# Altium PCB LM-004-B.PcbDoc
Units mm, origin at the board's own origin, x right, y up, seen from the top; angles counter-clockwise.
Board outline 54.74 x 91.16 mm, 2 copper layers (Top Layer, Bottom Layer), stack 0.325 mm thick; 42 components, 65 nets, 272 pads, 39 vias.
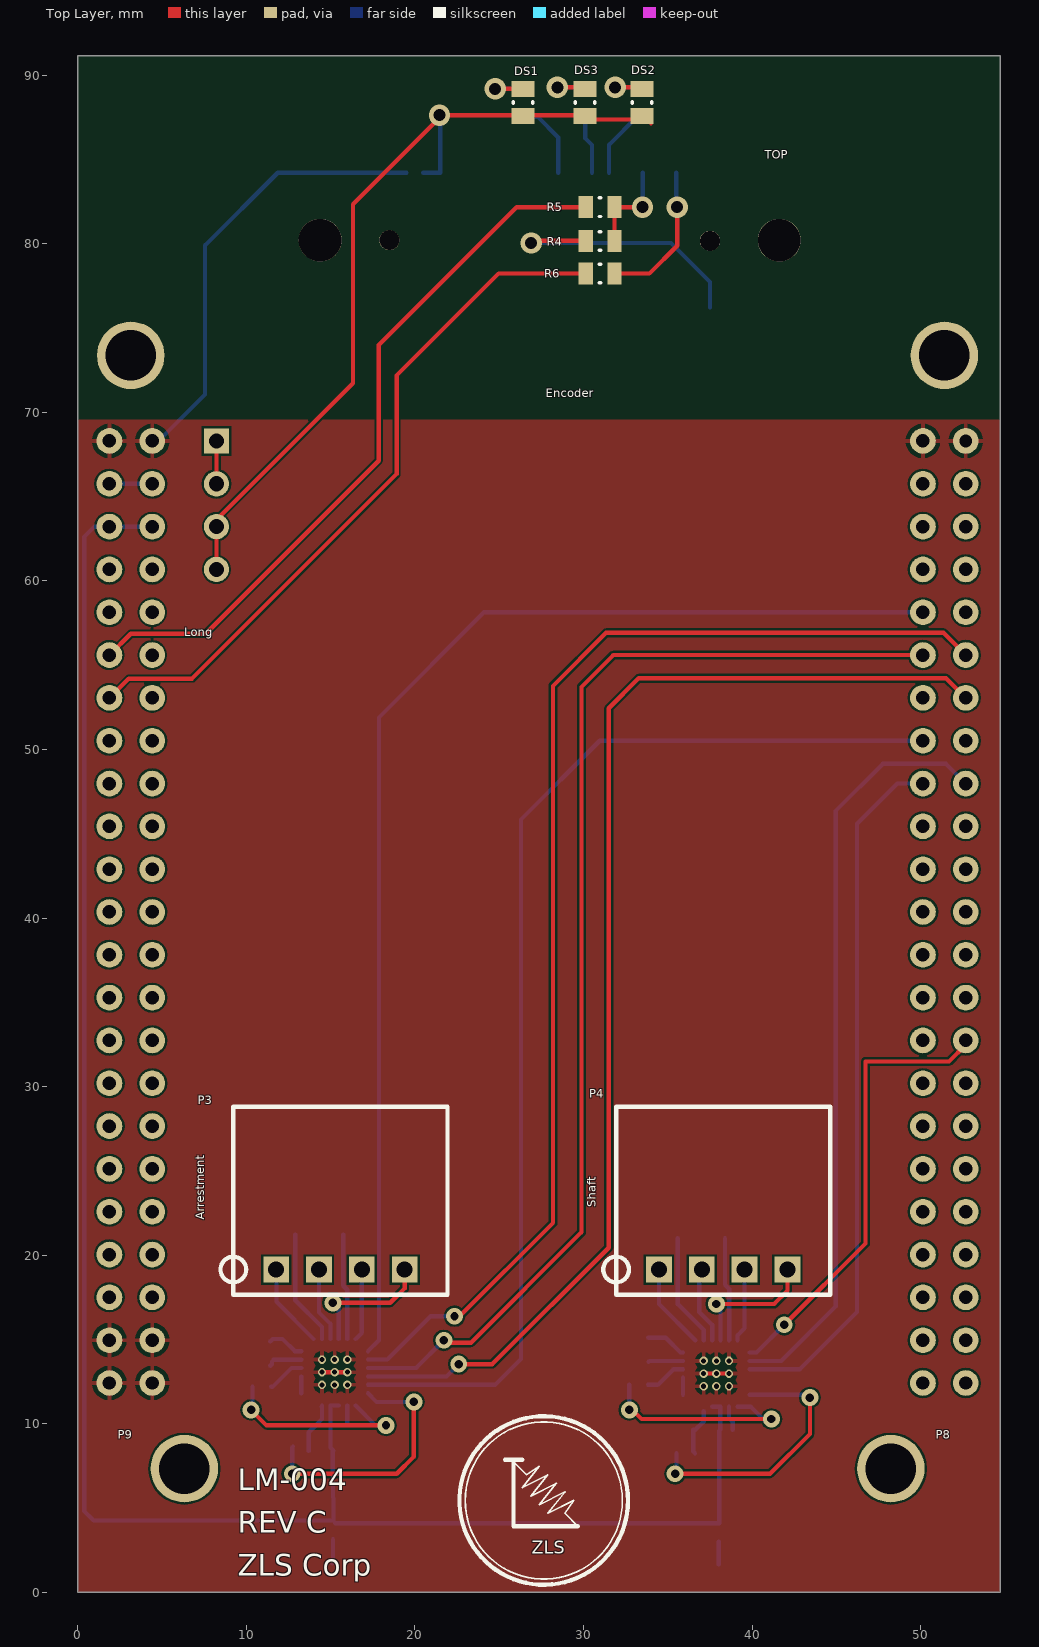
[diagram p0: Top Layer view]
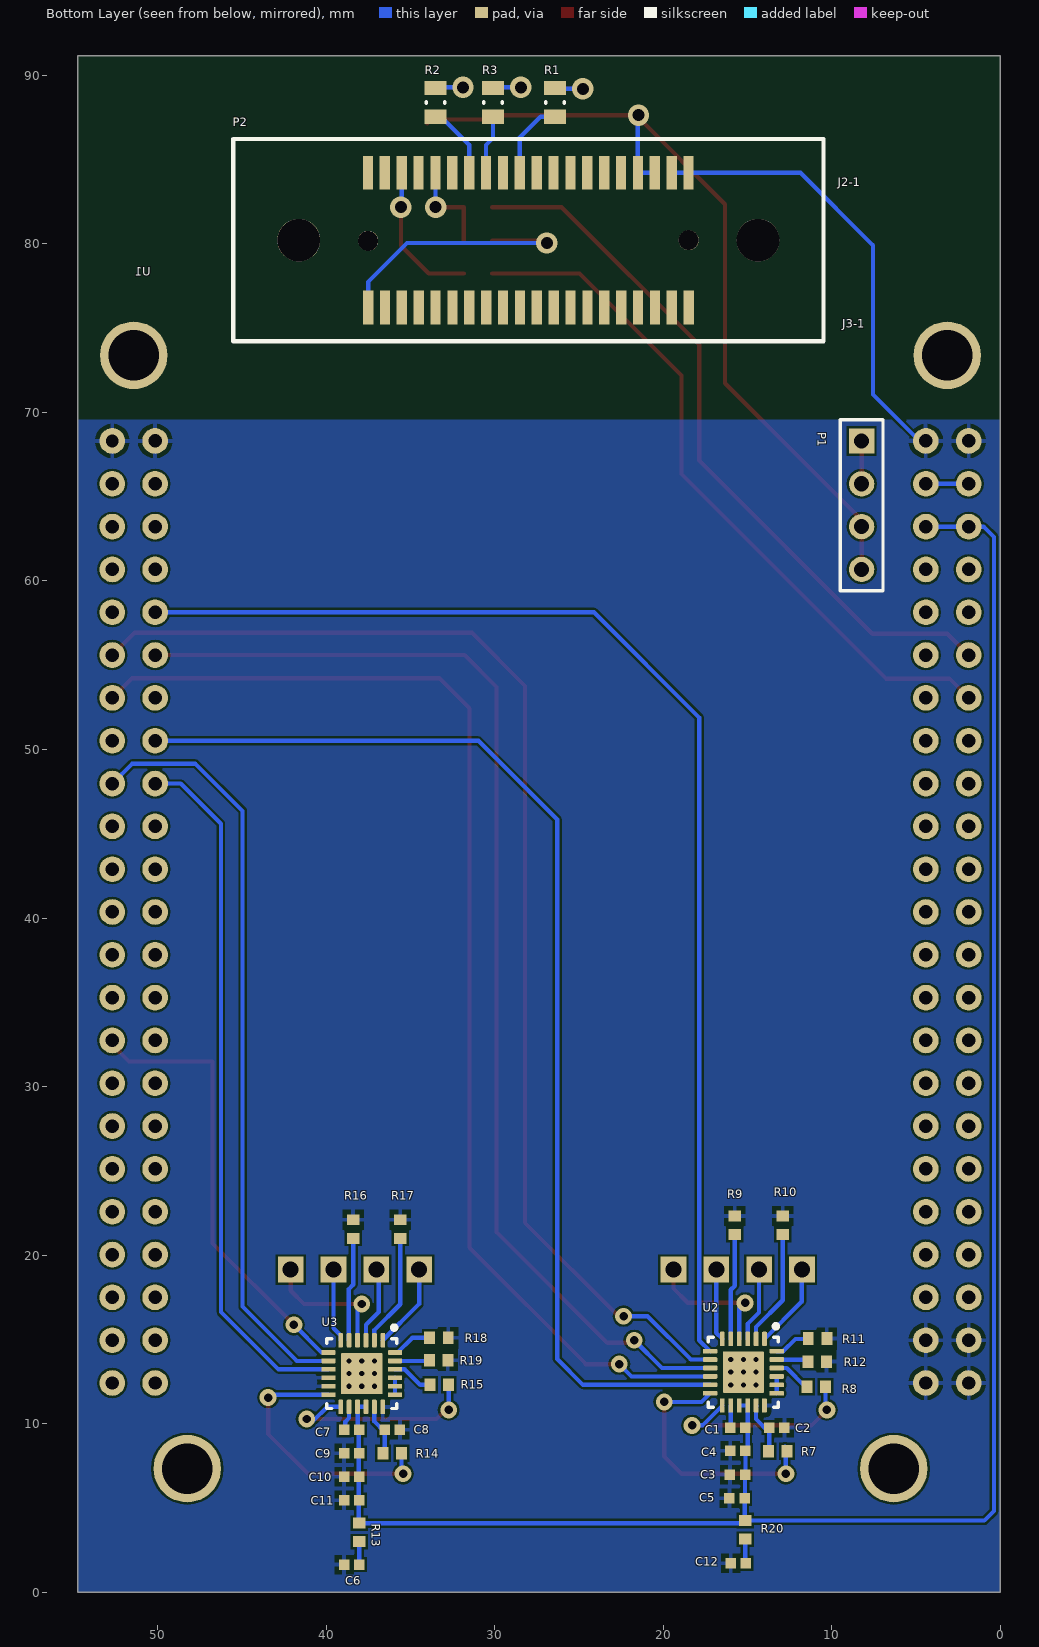
[diagram p1: Bottom Layer view, seen from below]

## Layer stack, top to bottom
Top Solder: solder mask 0.0102, Solder Resist, Dk 3.5
Top Layer: signal copper 0.0356
Dielectric 1: core 0.254, FR-4, Dk 4.2
Bottom Layer: signal copper 0.0356
Bottom Solder: solder mask 0.0102, Solder Resist, Dk 3.5

## Board outline
-0.006,0 54.737,0 54.737,91.161 -0.006,91.161

## Design rules (kind name [scope] priority, off if disabled: settings)
Clearance [All] p1: gap=0.127 ignorepadtopadclearanceinfootprint=FALSE
HoleSize [All] p1: absolutevalues=TRUE maxlimit=5 minlimit=0.025 maxpercent=80.000 minpercent=20.000
MinimumSolderMaskSliver [All] p1: minsoldermaskwidth=0.04
PolygonConnect [All] p1: connectstyle=Relief reliefconductorwidth=0.254 reliefentries=4 polygonreliefangle="90 Angle" airgapwidth=0.254
RoutingVias [All] p1: holewidth=0.711 width=1.27 viastyle="Through Hole" minholewidth=0.711 minwidth=1.27 maxholewidth=0.711 maxwidth=1.27
SilkToSolderMaskClearance [IsPad] p1: minsilkscreentomaskgap=0.1 clearancetoexposedcopper=TRUE
SolderMaskExpansion [All] p1: expansion=0.102
Width [All] p1: maxlimit=0.254 minlimit=0.254 preferedwidth=0.254
27 further rules are at their usual default settings.

## Classes and differential pairs
component class BBB_Connections: P1 U1
component class Bluetooth: DS1 DS2 DS3 P2 R1 R2 R3 R4 R5 R6
component class "Stepper Motor Driver": C1 C2 C3 C4 C5 C6 C7 C8 C9 C10 C11 C12 P3 P4 R7 R8 R9 R10 R11 R12 R13 R14 R15 R16 R17 R18 R19 R20 R29 U2 U3

## Components (designator, comment, footprint, x,y, rotation, side; value= is the part's Value field where it differs from the comment)
C1 ".01uF" CAPC0402(1005)60_N 15.57,9.779 r0 bottom
C2 "2.2uF" CAPC0402(1005)60_N 13.259,9.779 r0 bottom
C3 "10uF" CAPC0402(1005)60_N 15.596,6.985 r180 bottom
C4 ".01uF" CAPC0402(1005)60_N 15.57,8.407 r180 bottom
C5 ".01uF" CAPC0402(1005)60_N 15.621,5.588 r180 bottom
C6 "10uF" CAPC0402(1005)60_N 38.481,1.651 r180 bottom
C7 ".01uF" CAPC0402(1005)60_N 38.481,9.652 r0 bottom
C8 "2.2uF" CAPC0402(1005)60_N 36.068,9.652 r0 bottom
C9 "10uF" CAPC0402(1005)60_N 38.481,8.255 r180 bottom
C10 ".01uF" CAPC0402(1005)60_N 38.481,6.858 r180 bottom
C11 ".01uF" CAPC0402(1005)60_N 38.481,5.461 r180 bottom
C12 "10uF" CAPC0402(1005)60_N 15.545,1.727 r180 bottom
DS1 "Lite-On LTST-S220KGKT Green LED, 571 nm 2012 (0805) Side View, Rectangle Lens SMD package" 0805C_L 26.416,88.392 r90 top
DS2 "Lite-On LTST-S220KGKT Green LED, 571 nm 2012 (0805) Side View, Rectangle Lens SMD package" 0805C_L 33.477,88.392 r90 top
DS3 "Lite-On LTST-S220KGKT Green LED, 571 nm 2012 (0805) Side View, Rectangle Lens SMD package" 0805C_L 30.099,88.392 r90 top
P1 "SSW-104-01-G-S" HDR1X4 8.23,68.301 r270 bottom
P2 "FSI-120-03-G-D-E-AB" FSI-120-03-G-D-E-AB 27.997,80.213 r180 bottom
P3 "IPL1-104-01-L-S-RA-K" IPL1-104-01-L-S-RA-K 11.771,19.152 r0 top
P4 "IPL1-104-01-L-S-RA-K" IPL1-104-01-L-S-RA-K 34.479,19.152 r0 top
R1 "3.9k" RESC0805(2012)_L 26.416,88.392 r90 bottom
R2 "3.9k" RESC0805(2012)_L 33.503,88.392 r90 bottom
R3 "3.9k" RESC0805(2012)_L 30.099,88.392 r90 bottom
R4 "10K" RESC0805(2012)_L 30.988,80.173 r0 top value=3.9k
R5 "100" RESC0805(2012)_L 30.988,82.169 r0 top value=3.9k
R6 "100" RESC0805(2012)_L 30.988,78.232 r0 top value=3.9k
R7 "47K" RESC0402(1005)_M 13.208,8.382 r180 bottom
R8 "10k" RESC0402(1005)_M 10.922,12.192 r180 bottom
R9 "0.1R" RESC0402(1005)_M 15.75,21.773 r90 bottom
R10 "0.1R" RESC0402(1005)_M 12.905,21.773 r90 bottom
R11 "47K" RESC0402(1005)_M 10.846,15.062 r180 bottom
R12 "47K" RESC0402(1005)_M 10.871,13.691 r180 bottom
R13 "1" RESC0402(1005)_M 38.031,3.556 r270 bottom
R14 "47K" RESC0402(1005)_M 36.068,8.255 r180 bottom
R15 "10K" RESC0402(1005)_M 33.274,12.311 r180 bottom
R16 "0.1R" RESC0402(1005)_M 38.393,21.555 r90 bottom
R17 "0.1R" RESC0402(1005)_M 35.599,21.555 r90 bottom
R18 "47K" RESC0402(1005)_M 33.301,15.102 r180 bottom
R19 "47K" RESC0402(1005)_M 33.325,13.767 r180 bottom
R20 "1" RESC0402(1005)_M 15.14,3.708 r270 bottom
U1 "BBB" "BEAGLEBONE BLACK MEZANINE" 27.28,40.361 r180 bottom locked
U2 "DRV8834RGER" RGE0024B_V 15.242,13.061 r270 bottom
U3 "DRV8834RGER" RGE0024B_V 37.882,12.979 r270 bottom

## Footprints (in the part's own frame and the unit in brackets; to place one, negate y for a bottom-side part, rotate by r counter-clockwise, add the part's x,y. Pads: shape width x height; smd on the part's side, far side on the other; paste and mask are expansions set on the pad)
0805C_L [mm]
  rect 0.95x1.35 smd: 1(-0.8,0) 2(0.8,0)
  silkscreen extent -0.05,-0.58 0.05,0.58, body extent -1.1,-0.72 1.1,0.72, height 0.75
"BEAGLEBONE BLACK MEZANINE" [mil]
  round 60 hole 31.5: 8-1(-900,1100) 8-3(-900,1000) 8-4(-1000,1000) 8-5(-900,900) 8-6(-1000,900) 8-7(-900,800) 8-8(-1000,800) 8-9(-900,700) 8-10(-1000,700) 8-11(-900,600) 8-12(-1000,600) 8-13(-900,500) 8-14(-1000,500) 8-15(-900,400) 8-16(-1000,400) 8-17(-900,300) 8-18(-1000,300) 8-19(-900,200) 8-20(-1000,200) 8-21(-900,100) 8-22(-1000,100) 8-23(-900,0) 8-24(-1000,0) 8-25(-900,-100) 8-26(-1000,-100) 8-27(-900,-200) 8-28(-1000,-200) 8-29(-900,-300) 8-30(-1000,-300) 8-31(-900,-400) 8-32(-1000,-400) 8-33(-900,-500) 8-34(-1000,-500) 8-35(-900,-600) 8-36(-1000,-600) 8-37(-900,-700) 8-38(-1000,-700) 8-39(-900,-800) 8-40(-1000,-800) 8-41(-900,-900) 8-42(-1000,-900) 8-43(-900,-1000) 8-44(-1000,-1000) 8-45(-900,-1100) 8-46(-1000,-1100) 9-1(1000,1100) 9-2(900,1100) 9-3(1000,1000) 9-4(900,1000) 9-5(1000,900) 9-6(900,900) 9-7(1000,800) 9-8(900,800) 9-9(1000,700) 9-10(900,700) 9-11(1000,600) 9-12(900,600) 9-13(1000,500) 9-14(900,500) 9-15(1000,400) 9-16(900,400) 9-17(1000,300) 9-18(900,300) 9-19(1000,200) 9-20(900,200) 9-21(1000,100) 9-22(900,100) 9-23(1000,0) 9-24(900,0) 9-25(1000,-100) 9-26(900,-100) 9-27(1000,-200) 9-28(900,-200) 9-29(1000,-300) 9-30(900,-300) 9-31(1000,-400) 9-32(900,-400) 9-33(1000,-500) 9-34(900,-500) 9-35(1000,-600) 9-36(900,-600) 9-37(1000,-700) 9-38(900,-700) 9-39(1000,-800) 9-40(900,-800) 9-41(1000,-900) 9-42(900,-900) 9-43(1000,-1000) 9-44(900,-1000) 9-45(1000,-1100) 9-46(900,-1100)
  round 60 hole 30 paste+0: 8-2(-1000,1100)
  round 157.48 hole 118.11 paste+0: ""(-950,1300)
  round 157.48 hole 118.11: ""(-825,-1300) ""(825,-1300) ""(950,1300)
  body extent -1047,-1163 1048,1157, height 335
CAPC0402(1005)60_N [mm] "Chip Capacitor, Body 1.0x0.5mm, Height 0.6mm, IPC Medium Density"
  rect 0.62x0.62 smd: 1(-0.45,0) 2(0.45,0)
  body extent -0.55,-0.3 0.55,0.3, height 0.6
FSI-120-03-G-D-E-AB [mil]
  round 100 hole 100: hole(-536.2,0) hole(536.2,0)
  round 47 hole 47: hole(-374.3,-1.6) hole(374.3,0)
  rect 24x78.74 smd: J2-1(373.91,157.36) J2-2(334.51,157.36) J2-3(295.11,157.36) J2-4(255.71,157.36) J2-5(216.31,157.36) J2-6(176.91,157.36) J2-7(137.51,157.36) J2-8(98.11,157.36) J2-9(58.71,157.36) J2-10(19.31,157.36) J2-11(-20.09,157.36) J2-12(-59.49,157.36) J2-13(-98.89,157.36) J2-14(-138.29,157.36) J2-15(-177.69,157.36) J2-16(-217.09,157.36) J2-17(-256.49,157.36) J2-18(-295.89,157.36) J2-19(-335.29,157.36) J2-20(-374.69,157.36) J3-1(374.3,-157.36) J3-2(334.9,-157.36) J3-3(295.5,-157.36) J3-4(256.1,-157.36) J3-5(216.7,-157.36) J3-6(177.3,-157.36) J3-7(137.9,-157.36) J3-8(98.5,-157.36) J3-9(59.1,-157.36) J3-10(19.7,-157.36) J3-11(-19.7,-157.36) J3-12(-59.1,-157.36) J3-13(-98.5,-157.36) J3-14(-137.9,-157.36) J3-15(-177.3,-157.36) J3-16(-216.7,-157.36) J3-17(-256.1,-157.36) J3-18(-295.5,-157.36) J3-19(-334.9,-157.36) J3-20(-374.3,-157.36)
  silkscreen extent -689,-236 689,236, body extent -633,-179 710,188, height 162
HDR1X4 [mm] "Connector; Header; 4 Position"
  rect 1.5x1.5 hole 0.9: 1(0,0)
  round 1.5 hole 0.9: 2(2.54,0) 3(5.08,0) 4(7.62,0)
  silkscreen extent -1.27,-1.27 8.89,1.27
IPL1-104-01-L-S-RA-K [mil]
  rect 60x60 hole 37.4: 1(0,0) 2(100,0) 3(200,0) 4(300,0)
  silkscreen extent -130,-59 400,380, body extent -80,-12 380,380, height 258
RESC0402(1005)_M [mm] "Chip Resistor, Body 1.0x0.5mm, IPC Low Density"
  rect 0.65x0.75 smd: 1(-0.55,0) 2(0.55,0)
  body extent -0.52,-0.28 0.53,0.28, height 0.4
RESC0805(2012)_L [mm] "Chip Resistor, Body 2.0x1.3mm, IPC High Density"
  rect 0.85x1.3 smd: 1(-0.85,0) 2(0.85,0)
  silkscreen extent -0.05,-0.55 0.05,0.55, body extent -1.1,-0.67 1.1,0.68, height 0.7
RGE0024B_V [mm] "QFN, 24-Leads, Body 4x4mm, Pitch 0.5mm, Thermal Pad 2.45x2.45mm"
  rrect36% 0.85x0.28 smd paste-0.025 mask+0.07: 1(-1.975,1.25) 2(-1.975,0.75) 3(-1.975,0.25) 4(-1.975,-0.25) 5(-1.975,-0.75) 6(-1.975,-1.25) 13(1.975,-1.25) 14(1.975,-0.75) 15(1.975,-0.25) 16(1.975,0.25) 17(1.975,0.75) 18(1.975,1.25)
  rrect36% 0.28x0.85 smd paste-0.025 mask+0.07: 7(-1.25,-1.975) 8(-0.75,-1.975) 9(-0.25,-1.975) 10(0.25,-1.975) 11(0.75,-1.975) 12(1.25,-1.975) 19(1.25,1.975) 20(0.75,1.975) 21(0.25,1.975) 22(-0.25,1.975) 23(-0.75,1.975) 24(-1.25,1.975)
  rrect4% 2.45x2.45 smd paste-3 mask+0.07: 25(0,0)
  silkscreen extent -2.85,-2.07 2.07,2.07, body extent -2,-2 2,2, height 1

## Part data
C1 C2 C3 C4 C5 C6 C7 C8 C9 C10 C11 C12: library part CMP-1034-01365-1, "CAP 220pF 25V ±10% 0402 (1005 Metric) Thickness 0.6mm SMD"
DS1 DS2 DS3: library part "LED A/K", Case/Package=0805, Case Code (Metric)=2012, Colour=Green, Forward Current=20mA, Forward Voltage=2V, Lens Colour=Colorless, Manufacturer="Vishay / Lite-On", Manufacturer Part Number=LTST-S220KGKT, Max Operating Temperature=85°C, Min Operating Temperature=-55°C, Package Quantity=4000, Power Dissipation=75W, Power Rating=75mW, Supplier Part Number 1=160-1468-1-ND, Case Code (Imperial)=0805, ComponentLink1Description=https://datasheet.ciiva.com/11775/0900766b80dc0b70-11775441.pdf, ComponentLink1URL=https://datasheet.ciiva.com/11775/0900766b80dc0b70-11775441.pdf, ComponentLink2Description=https://datasheet.ciiva.com/2110/s-110-ltst-s220kgkt-2110069.pdf, ComponentLink2URL=https://datasheet.ciiva.com/2110/s-110-ltst-s220kgkt-2110069.pdf, ComponentLink3Description=https://datasheet.ciiva.com/2110/s-110-ltst-s220kgkt-2110070.pdf, ComponentLink3URL=https://datasheet.ciiva.com/2110/s-110-ltst-s220kgkt-2110070.pdf, ComponentLink4Description=https://datasheet.ciiva.com/12400/100-ltst-s220kgkt-59602-12400886.pdf, ComponentLink4URL=https://datasheet.ciiva.com/12400/100-ltst-s220kgkt-59602-12400886.pdf, ComponentLink5Description=https://datasheet.ciiva.com/2110/s-110-ltst-s220kgkt-2110071.pdf, ComponentLink5URL=https://datasheet.ciiva.com/2110/s-110-ltst-s220kgkt-2110071.pdf, ComponentLink6Description=https://datasheet.ciiva.com/16379/ltst-s220kgkt-16379082.pdf, ComponentLink6URL=https://datasheet.ciiva.com/16379/ltst-s220kgkt-16379082.pdf, ComponentLink7Description=http://www.farnell.com/cad/2124774.pdf, ComponentLink7URL=http://www.farnell.com/cad/2124774.pdf, ComponentLink8Description=http://www.farnell.com/datasheets/693084.pdf, ComponentLink8URL=http://www.farnell.com/datasheets/693084.pdf, Depth=0.6mm, Dominant Wavelength=568nm, Height=0.6mm, Illumination Colour=Green, Lead Free="Lead Free", Length=2.1mm, Lens Style=Diffused,Colorless, Lens Transparency=Clear, Luminous Intensity=35mcd, Mount="Surface Mount", Number of Elements=1, Number of LEDs=1, Number of Pins=2, Packaging="Tape and Reel", Pricing 1="1=0.29, 10=0.212, 25=0.1564, 100=0.1117, 250=0.0759, 500=0.067, 1000=0.0525 (USD)", Pricing 2="1=0.325, 10=0.317, 100=0.23, 200=0.228, 400=0.182, 900=0.147, 3000=0.114, 9000=0.107 (GBP)", Radiation Hardening=No, RoHS=YES, Stock 1=74800, Stock 2=2271, Supplier 1=Digi-Key, Supplier 2=Farnell, Supplier Part Number 2=2062310, Test Current=20mA, Viewing Angle=130°, Wavelength=574nm, Width=1mm
P1: library part "Header 4", "Header, 4-Pin", Current Rating="5.7A per Contact", Insulation Color=Black, Manufacturer="Samtec Inc.", Material Flammability Rating="UL94 V-0", Operating Temperature="-55°C ~ 125°C", Supplier Part Number 1=SAM1209-04-ND, Voltage Rating=-, Applications=-, Category="Connectors, Interconnects", ComponentLink1Description=http://suddendocs.samtec.com/prints/ssw-1xx-xx-xxx-x-xx-xxx-xx-mkt.pdf, ComponentLink1URL=http://suddendocs.samtec.com/prints/ssw-1xx-xx-xxx-x-xx-xxx-xx-mkt.pdf, Connector Type=Receptacle, Contact Finish - Mating=Gold, Contact Finish - Post=Gold, Contact Finish Thickness - Mating="20.0µin (0.51µm)", Contact Finish Thickness - Post="3.00µin (0.076µm)", Contact Length - Post="0.104\" (2.64mm)", Contact Material="Phosphor Bronze", Contact Shape=Square, Contact Type=Forked, Fastening Type=Push-Pull, Features=-, Ingress Protection=-, Insulation Height="0.335\" (8.51mm)", Insulation Material="Liquid Crystal Polymer (LCP)", Manufacturer Part Number=SSW-104-01-G-S, Mated Stacking Heights=-, Mounting Type="Through Hole", Number of Positions=4, Number of Positions Loaded=All, Packaging=Bulk, Part Status=Active, Pitch - Mating="0.100\" (2.54mm)", Pricing 1="1=1.85, 10=1.654, 100=1.3623, 500=1.07684, 1000=0.9244, 5000=0.84331, 10000=0.81088 (USD)", RoHS="RoHS Compliant", Row Spacing - Mating=-, Stock 1=360, Style="Board to Board or Cable", Supplier 1=Digi-Key, Termination=Solder
P3 P4: Supplier Part Number 1=SAM9597-ND, Supplier 1=Digi-Key
R1 R2 R3 R4 R5 R6: library part CMP-1013-00215-1, "2R55 0.125W 1% 0805 (2012 Metric)  SMD", Case-EIA=0805, Case-Metric=2012, Power="0.125 W", Tolerance="1 %", Technology=SMT
R7 R8 R9 R10 R11 R12 R13 R14 R15 R16 R17 R18 R19 R20: library part CMP-1011-00463-1
U1: library part Beaglebone_Black_Mezanine, "Beaglebone Black", Current Rating="5.7A per Contact", Insulation Color=Black, Manufacturer="Samtec Inc.", Manufacturer Part Number=SSW-123-01-G-D-LL, Material Flammability Rating="UL94 V-0", Operating Temperature="-55°C ~ 125°C", Supplier Part Number 1=SSW-123-01-G-D-LL-ND, Voltage Rating=-, Applications=-, Category="Connectors, Interconnects", Connector Type=Receptacle, Contact Finish - Mating=Gold, Contact Finish - Post=Gold, Contact Finish Thickness - Mating="20.0µin (0.51µm)", Contact Finish Thickness - Post="3.00µin (0.076µm)", Contact Length - Post="0.104\" (2.64mm)", Contact Material="Phosphor Bronze", Contact Shape=Square, Contact Type=Forked, Fastening Type=Push-Pull, Features=-, Ingress Protection=-, Insulation Height="0.335\" (8.51mm)", Insulation Material="Liquid Crystal Polymer (LCP)", Mated Stacking Heights=-, Mounting Type="Through Hole", Number of Positions=46, Number of Positions Loaded=All, Packaging=Bulk, Part Status=Active, Pitch - Mating="0.100\" (2.54mm)", Pricing 1="1=6.07 (USD)", RoHS="RoHS Compliant", Row Spacing - Mating="0.100\" (2.54mm)", Stock 1=0, Style="Board to Board or Cable", Supplier 1=Digi-Key, Termination="Kinked Pin, Solder"
U2 U3: library part CMP-1685-00004-1, "Dual-Bridge Stepper or DC Motor Driver, 2.5 to 10.8 V, -40 to 85 degC, 24-pin QFN (RGE), Green (RoHS & no Sb/Br), Tape and Reel", Max Operating Temperature="85 degC", Min Operating Temperature="-40 degC", Min Supply Voltage="2.5 V", Nominal Supply Current="4 mA", Output Current="1.5 A", Package Quantity=3000, ComponentLink1Description="Manufacturer URL", ComponentLink1URL=http://www.ti.com/, ComponentLink2Description=Datasheet, ComponentLink2URL=http://www.ti.com/general/docs/lit/getliterature.tsp?genericPartNumber=DRV8834&fileType=pdf, DatasheetVersion="SLVSB19D, 03/2015", Mount="Surface Mount", Mounting Technology="Surface Mount", PackageDescription="24-Pin Quad Flat No-lead Package, Body 4 x 4 mm, Pitch 0.5 mm", PackageReference=RGE0024B, Packaging="Tape and Reel", Pins=24, Radiation Hardening=No, RoHSCompliant=true
P2: Supplier 1=Avnet, Supplier Part Number 1=FSI-120-03-G-D-E-AB

## Via types
v1: diameter 0.5, hole 0.3, Top Layer to Bottom Layer, 18 vias
v2: diameter 1, hole 0.5, Top Layer to Bottom Layer, 14 vias
v3: diameter 1.27, hole 0.711, Top Layer to Bottom Layer, 7 vias

## Nets (pads, with @x,y where several pads share a name; then routed paths per layer and width w, separated by ;. In a path a pad name is that pad's centre, name@x,y a point inside that pad or via, vN(x,y) a via of type N, cw(c..) or ccw(c..) an arc to the next point about the centre after c; other vN are vias at no path point)
+3.3: DS1.1 DS2.1 DS3.1 P1.3 P1.4 P2.J2-3 P2.J2-4 | length 49
  Top Layer w0.254: P1.4 P1.3 ; P1.3@8.23,63.627 16.332,71.73 16.332,82.347 v3@21.502,87.517 ; v3(21.463,87.63) 29.812,87.63 DS3.1@29.926,87.517 ; DS3.1@29.926,87.376 33.782,87.376 DS2.1@34.004,87.154
  Bottom Layer w0.254: P2.J2-3 P2.J2-4 21.502,87.591 v3(21.463,87.63)
"+3.3 BBB": U1.9-3 U1.9-4 | length 2.5
  Bottom Layer w0.254: U1.9-3 U1.9-4
"+5 BBB": C1.1 C3.2 C4.2 C5.2 C7.1 C9.2 C10.2 C11.2 R13.1 R20.1 U1.9-5 U1.9-6 U2.15 U2.16 U3.15 U3.16 | length 114.9
  Bottom Layer w0.254: U1.9-6 U1.9-5 0.991,63.221 0.381,62.611 0.381,4.826 0.949,4.258 R20.1 ; C4.2 15.12,7.01 C3.2 15.146,5.613 C5.2 15.171,4.289 R20.1 ; C4.2@15.17,8.407 14.992,8.586 U2.16 U2.15 ; U3.16 U3.15 38.119,10.991 38.119,9.665 38.132,9.652 38.056,9.575 R13.1@38.056,4.106 ; R13.1 15.293,4.106 R20.1
+12: P1.1 P1.2 | length 2.5
  Top Layer w0.254: P1.2 P1.1
ARRESTMENT_A1: P4.1 U3.1 | length 4.9
  Bottom Layer w0.254: P4.1@34.479,18.999 34.479,17.108 U3.1
ARRESTMENT_A2: P4.2 U3.3 | length 4.4
  Bottom Layer w0.254: P4.2@37.019,18.999 36.869,18.85 36.869,16.634 37.632,15.871 U3.3
ARRESTMENT_B1: P4.3 U3.6 | length 4.2
  Bottom Layer w0.254: U3.6 39.132,15.245 39.559,15.672 P4.3@39.559,18.999
ARRESTMENT_B2: P4.4 U3.4 | length 8.3
  Top Layer w0.254: v2(37.885,17.108) 41.313,17.108 42.099,17.894 P4.4@42.099,18.999
  Bottom Layer w0.254: v2(37.885,17.108) 37.947,17.108 38.132,17.293 U3.4
"Blue LED": P2.J2-14 R2.1 | length 4.1
  Bottom Layer w0.254: P2.J2-14 31.509,85.865 R2.1@33.237,87.593
Bluetooth_RXD: P2.J2-18 R6.2 | length 8.8
  Top Layer w0.254: R6.2 33.909,78.232 35.56,79.883 v3(35.56,82.169)
  Bottom Layer w0.254: P2.J2-18 35.512,82.217 v3(35.56,82.169)
Bluetooth_TXD: P2.J2-16 R4.2 R5.2 | length 5.7
  Top Layer w0.254: R4.2 R5.2 v3(33.501,82.169)
  Bottom Layer w0.254: v3(33.501,82.169) 33.511,82.179 P2.J2-16
GND: C2.1 C3.1 C4.1 C5.1 C6.1 C8.1 C9.1 C10.1 C11.1 C12.1 P2.J2-1 P2.J2-2 R9.2 R10.2 R11.2 R12.2 R16.2 R17.2 R18.2 R19.2 U1.8-1 U1.8-2 U1.9-1 U1.9-2 U1.9-43 U1.9-44 U1.9-45 U1.9-46 U2.18 U2.25 U3.10 U3.11 U3.18 U3.25 | length 29.9
  Top Layer w0.254: v1(14.492,13.061) v1(15.242,13.061) v1(15.992,13.061) ; v1(37.132,12.979) v1(37.882,12.979) v1(38.632,12.979)
  Bottom Layer w0.254: U1.9-2 4.801,68.301 7.556,71.056 7.556,79.905 11.862,84.21 P2.J2-1 P2.J2-2
  other v1: 37.132,12.229 37.882,12.229 38.632,12.229 14.492,12.311 15.242,12.311 15.992,12.311 37.132,13.729 37.882,13.729 38.632,13.729 14.492,13.811 15.242,13.811 15.992,13.811
"Green LED": P2.J2-13 R3.1 | length 3.6
  Bottom Layer w0.254: R3.1@30.099,87.593 30.099,86.265 30.509,85.855 P2.J2-13
NetC1_2: C1.2 U2.14 | length 1.1
  Bottom Layer w0.254: C1.2@15.992,10.008 U2.14
NetC6_2: C6.2 R13.2 | length 1.4
  Bottom Layer w0.254: C6.2 R13.2
NetC7_2: C7.2 U3.14 | length 1.4
  Bottom Layer w0.254: U3.14 38.632,10.35 38.856,10.127 C7.2@38.856,9.652
NetC12_2: C12.2 R20.2 | length 1.5
  Bottom Layer w0.254: C12.2 15.14,1.773 R20.2
NetDS1_2: DS1.2 R1.2 | length 3.3
  Top Layer w0.254: v3(24.765,89.192) DS1.2
  Bottom Layer w0.254: v3(24.765,89.192) 26.366,89.192 R1.2
NetDS2_2: DS2.2 R2.2 | length 3.1
  Top Layer w0.254: v3(31.877,89.281) 33.312,89.281 DS2.2@33.401,89.192
  Bottom Layer w0.254: v3(31.877,89.281) 33.362,89.281 R2.2@33.401,89.242
NetDS3_2: DS3.2 R3.2 | length 3.4
  Top Layer w0.254: v3(28.448,89.281) 30.01,89.281 DS3.2
  Bottom Layer w0.254: v3(28.448,89.281) 30.06,89.281 R3.2
NetR7_2: R7.2 U2.12 | length 15.5
  Top Layer w0.254: v2(12.725,7.036) 18.923,7.036 19.939,8.052 v2(19.939,11.303)
  Bottom Layer w0.254: v2(12.725,7.036) 12.725,8.602 R7.2@12.776,8.653 ; U2.12 17.729,11.299 19.935,11.299 v2(19.939,11.303)
NetR8_1: R8.1 U2.22 | length 2.3
  Bottom Layer w0.254: R8.1 11.557,12.192 12.676,13.311 U2.22
NetR8_2: R8.2 U2.13 | length 12.1
  Top Layer w0.254: v2(10.287,10.822) 11.203,9.906 v2(18.288,9.906)
  Bottom Layer w0.254: v2(10.287,10.822) 10.372,10.907 R8.2 ; U2.13 17.672,9.906 v2(18.288,9.906)
NetR9_1: R9.1 U2.5 | length 6.3
  Bottom Layer w0.254: R9.1 15.75,18.192 15.992,17.95 U2.5
NetR10_1: R10.1 U2.2 | length 6.8
  Bottom Layer w0.254: R10.1 12.905,17.328 14.492,15.742 U2.2
NetR11_1: R11.1 U2.24 | length 2.2
  Bottom Layer w0.254: R11.1@11.423,14.89 11.57,15.037 12.149,15.037 12.874,14.311 U2.24
NetR12_1: R12.1 U2.23 | length 2.1
  Bottom Layer w0.254: R12.1@11.423,13.442 11.521,13.54 11.521,13.7 11.619,13.798 13.254,13.798 U2.23
NetR14_2: R14.2 U3.12 | length 16
  Top Layer w0.254: v2(35.433,7.036) 41.072,7.036 43.434,9.398 v2(43.434,11.557)
  Bottom Layer w0.254: v2(35.433,7.036) 35.518,7.121 R14.2 ; U3.12 43.262,11.729 v2(43.434,11.557)
NetR15_1: R15.1 U3.22 | length 2.5
  Bottom Layer w0.254: R15.1 34.409,12.311 35.327,13.229 U3.22
NetR15_2: R15.2 U3.13 | length 12.6
  Top Layer w0.254: v2(32.724,10.822) 32.916,10.822 33.451,10.287 v2(41.148,10.287)
  Bottom Layer w0.254: R15.2 v2(32.724,10.822) v2@32.751,10.795 ; U3.13 39.93,11.004 40.744,10.191 40.84,10.287 v2(41.148,10.287)
NetR16_1: R16.1 U3.5 | length 6.2
  Bottom Layer w0.254: R16.1 38.393,18.253 38.647,17.999 38.647,14.969 U3.5
NetR17_1: R17.1 U3.2 | length 6.7
  Bottom Layer w0.254: R17.1 35.599,17.091 37.132,15.558 U3.2
NetR18_1: R18.1 U3.24 | length 2.4
  Bottom Layer w0.254: R18.1 34.881,15.102 35.754,14.229 U3.24
NetR19_1: R19.1 U3.23 | length 2.1
  Bottom Layer w0.254: R19.1@33.863,13.681 33.912,13.729 U3.23
NetU1_8-9: U1.8-9 U2.7 | length 72.7
  Bottom Layer w0.254: U2.7 17.867,14.961 17.867,51.903 24.105,58.141 U1.8-9
NetU1_8-10: U1.8-10
NetU1_8-11: U1.8-11 U2.9 | length 69.5
  Top Layer w0.254: v2(21.717,14.954) 21.86,14.812 23.325,14.812 29.883,21.37 29.883,53.708 31.775,55.601 U1.8-11
  Bottom Layer w0.254: U2.9 20.074,13.311 v2(21.717,14.954)
NetU1_8-12: U1.8-12 U2.8 | length 72.5
  Top Layer w0.254: v2(22.352,16.383) 22.657,16.383 28.194,21.92 28.194,53.772 31.344,56.921 51.359,56.921 U1.8-12
  Bottom Layer w0.254: U2.8 18.358,13.811 20.93,16.383 v2(22.352,16.383)
NetU1_8-14: U1.8-14 U2.10 | length 71.8
  Top Layer w0.254: v2(22.606,13.54) 24.589,13.54 31.496,20.447 31.496,52.451 33.274,54.229 51.511,54.229 U1.8-14
  Bottom Layer w0.254: U2.10 21.877,12.811 v2(22.606,13.54)
NetU1_8-15: U1.8-15 U2.11 | length 67.5
  Bottom Layer w0.254: U2.11 24.757,12.311 26.289,13.843 26.289,45.847 30.963,50.521 U1.8-15
NetU1_8-17: U1.8-17 U3.9 | length 41.6
  Bottom Layer w0.254: U3.9 42.822,13.229 46.228,16.635 46.228,45.593 48.616,47.981 U1.8-17
NetU1_8-18: U1.8-18 U3.8 | length 45.2
  Bottom Layer w0.254: U3.8 41.732,13.729 44.958,16.955 44.958,46.355 47.752,49.149 51.511,49.149 U1.8-18
NetU1_8-27: U1.8-27
NetU1_8-30: U1.8-30 U3.7 | length 27
  Top Layer w0.254: v2(41.91,15.875) 46.736,20.701 46.736,31.496 51.689,31.496 52.68,32.487 U1.8-30
  Bottom Layer w0.254: U3.7 40.264,14.229 v2(41.91,15.875)
NetU1_8-35: U1.8-35
NetU1_8-36: U1.8-36
NetU1_8-37: U1.8-37
NetU1_8-38: U1.8-38
NetU1_9-9: U1.9-9
NetU2_19: U2.19 U2.20 U2.21 | length 1
  Bottom Layer w0.254: U2.19 U2.20 U2.21
NetU3_19: U3.19 U3.20 U3.21 | length 1
  Bottom Layer w0.254: U3.19 U3.20 U3.21
"Red LED": P2.J2-11 R1.1 | length 4.7
  Bottom Layer w0.254: R1.1 27.266,87.542 28.507,86.301 P2.J2-11
RS232_RX: R5.1 U1.9-11 | length 43.3
  Top Layer w0.254: U1.9-11 3.15,56.871 7.595,56.871 17.856,67.132 17.856,73.99 26.035,82.169 R5.1
RS232_TX: R6.1 U1.9-13 | length 42.2
  Top Layer w0.254: U1.9-13@1.88,52.96 U1.9-13 3.023,54.204 6.782,54.204 18.917,66.339 18.917,72.181 24.968,78.232 R6.1
SHAFT_A1: P3.1 U2.1 | length 5
  Bottom Layer w0.254: P3.1 11.788,19.135 11.788,17.241 U2.1
SHAFT_A2: P3.2 U2.3 | length 4.4
  Bottom Layer w0.254: P3.2 14.311,16.608 14.992,15.927 U2.3
SHAFT_B1: P3.3 U2.6 | length 4.3
  Bottom Layer w0.254: U2.6 16.851,15.395 P3.3
SHAFT_B2: P3.4 U2.4 | length 8
  Top Layer w0.254: v2(15.14,17.176) 18.544,17.176 19.391,18.023 P3.4
  Bottom Layer w0.254: v2(15.14,17.176) 15.492,16.824 U2.4
SPI1_CS0: U1.9-28
SPI1_MISO: U1.9-29
SPI1_MOSI: U1.9-30
SPI1_SCLK: U1.9-31
VCC_2V85: P2.J3-20 R4.1 | length 16.4
  Top Layer w0.254: v3(26.897,80.046) 27.024,80.173 R4.1
  Bottom Layer w0.254: v3(26.897,80.046) 35.192,80.046 37.504,77.734 P2.J3-20
VINTA: C8.2 R14.1 U3.17 | length 2.9
  Bottom Layer w0.254: C8.2 36.518,8.355 R14.1 ; C8.2@36.547,9.554 37.132,10.139 37.132,10.749 U3.17@37.131,10.75
VINTS: C2.2 R7.1 U2.17 | length 3.1
  Bottom Layer w0.254: R7.1@13.709,8.382 13.709,9.499 14.492,10.282 U2.17 ; U2.17@14.467,11.01 U2.17@14.486,11.08
pads on no net: P2.hole P2.J2-5 P2.J2-6 P2.J2-7 P2.J2-8 P2.J2-9 P2.J2-10 P2.J2-12 P2.J2-15 P2.J2-17 P2.J2-19 P2.J2-20 P2.J3-1 P2.J3-2 P2.J3-3 P2.J3-4 P2.J3-5 P2.J3-6 P2.J3-7 P2.J3-8 P2.J3-9 P2.J3-10 P2.J3-11 P2.J3-12 P2.J3-13 P2.J3-14 P2.J3-15 P2.J3-16 P2.J3-17 P2.J3-18 P2.J3-19 U1. U1.8-3 U1.8-4 U1.8-5 U1.8-6 U1.8-7 U1.8-8 U1.8-13 U1.8-16 U1.8-19 U1.8-20 U1.8-21 U1.8-22 U1.8-23 U1.8-24 U1.8-25 U1.8-26 U1.8-28 U1.8-29 U1.8-31 U1.8-32 U1.8-33 U1.8-34 U1.8-39 U1.8-40 U1.8-41 U1.8-42 U1.8-43 U1.8-44 U1.8-45 U1.8-46 U1.9-7 U1.9-8 U1.9-10 U1.9-12 U1.9-14 U1.9-15 U1.9-16 U1.9-17 U1.9-18 U1.9-19 U1.9-20 U1.9-21 U1.9-22 U1.9-23 U1.9-24 U1.9-25 U1.9-26 U1.9-27 U1.9-32 U1.9-33 U1.9-34 U1.9-35 U1.9-36 U1.9-37 U1.9-38 U1.9-39 U1.9-40 U1.9-41 U1.9-42

## Polygon pours and split planes (outlines as drawn)
GND on Bottom Layer "GND" (solid, pour order 0): 54.737,69.571 54.737,0 -0.006,0 -0.006,69.571
GND on Top Layer "GND" (solid, pour order 2): 54.737,69.571 54.737,0 -0.006,0 -0.006,69.571

## Silkscreen, mask and mechanical layers (free items; w line width, h text height)
Top Overlay:
  circle w0.1: c27.647,5.451 r4.663
  circle w0.254: c27.647,5.451 r5
  lines w0.1: 25.857,7.737 26.619,6.975 27.381,7.483 26.365,6.213 27.889,6.975 26.873,5.705 28.397,6.467 27.381,5.197 28.905,5.959 27.889,4.689 29.413,5.451 28.905,4.689 29.667,3.927
  lines w0.254: 25.349,7.864 26.365,7.864 ; 25.857,7.737 25.857,3.927 29.667,3.927
  text "TOP" at 40.759,85.039 h0.5
  text "Encoder" at 27.762,70.891 h0.5
  text "Long" at 6.325,56.718 h0.5
  text "Shaft" at 30.734,22.86 h0.5 r90
  text "Arrestment" at 7.493,22.098 h0.5 r90
  text "LM-004" at 9.5,6.071 h1.27
  text "REV C" at 9.5,3.531 h1.27
  text "ZLS" at 26.944,2.29 h0.75
  text "ZLS Corp" at 9.5,0.991 h1.27

## Dimensions
-0.006,91.161 to 54.737,91.161 on Mechanical 13
-0.006,0 to -0.006,91.161 on Mechanical 13

## Text inside footprints (layer, text, board x,y; h text height)
P2: Bottom Overlay "J2-1" at 9.645,83.413 h0.5; Bottom Overlay "J3-1" at 9.391,75.031 h0.5
U1: Top Overlay "P8" at 50.902,9.119 h0.5; Top Overlay "P9" at 2.388,9.119 h0.5